# EAGLE board project_mount_board (EAGLE 9.1.3)

Size 100 x 80 mm. Coordinates in mm from the lower left corner, seen from the top.
Outline: 0,0 100,0 100,80 0,80 0,0
Copper layers (1*16): Top 0.035mm / dielectric 1.5mm / Bottom 0.035mm
Design rules "default": minimum track width 6mil, minimum drill 0.35mm, track to track 6mil, track to pad 6mil, pad to pad 6mil, via to via 6mil, smd to smd 6mil, copper to edge 40mil, drill to drill 6mil, minimum pad ring 10mil, minimum via ring 8mil, stop-mask expansion 4mil, vias tented up to drill 0mil, thermal gap 10mil

## Footprints (pad centres in the part's own frame; a part is rotated, then mirrored left to right if it is on the bottom)
ARDUINO_R3 = drill 1.016 pad 1.93: 3.3V 2.54,-24.13; 5V 5.08,-24.13; A0 17.78,-24.13; A1 20.32,-24.13; A2 22.86,-24.13; A3 25.4,-24.13; A4 27.94,-24.13; A5 30.48,-24.13; AREF -9.144,24.13; D0 30.48,24.13; D1 27.94,24.13; D2 25.4,24.13; D3 22.86,24.13; D4 20.32,24.13; D5 17.78,24.13; D6 15.24,24.13; D7 12.7,24.13; D8 8.636,24.13; D9 6.096,24.13; D10 3.556,24.13; D11 1.016,24.13; D12 -1.524,24.13; D13 -4.064,24.13; GND@1 7.62,-24.13; GND@2 10.16,-24.13; GND@3 -6.604,24.13; GND@4 33.16,-1.32; IOREF -2.54,-24.13; MISO 30.62,3.76; MOSI 33.16,1.22; NC -5.08,-24.13; RESET@1 0,-24.13; RESET@2 30.62,-1.32; SCK 30.62,1.22; SCL -14.224,24.13; SDA -11.684,24.13; VCC 33.16,3.76; VIN 12.7,-24.13 | hole 3.175: -17.78,24.13; 33.02,8.89; 33.02,-19.05; -19.05,-24.13
1X04 = drill 1.016 pad 1.88: 1 0,0; 2 2.54,0; 3 5.08,0; 4 7.62,0
2X5-SHROUDED-NO_SILK = drill 1.016 pad 1.88 square: 1 -1.27,5.08 | drill 1.016 pad 1.88: 2 1.27,5.08; 3 -1.27,2.54; 4 1.27,2.54; 5 -1.27,0; 6 1.27,0; 7 -1.27,-2.54; 8 1.27,-2.54; 9 -1.27,-5.08; 10 1.27,-5.08
1X11_NO_SILK = drill 1.016 pad 1.88: 1 0,0; 2 2.54,0; 3 5.08,0; 4 7.62,0; 5 10.16,0; 6 12.7,0; 7 15.24,0; 8 17.78,0; 9 20.32,0; 10 22.86,0; 11 25.4,0
1X07 = drill 1.016 pad 1.88: 1 0,0; 2 2.54,0; 3 5.08,0; 4 7.62,0; 5 10.16,0; 6 12.7,0; 7 15.24,0

## Placement (x,y rotation side)
B2  ARDUINO_UNO_R3  [ARDUINO_R3]  -177.8,-29.21 0 top  (outside the outline)
J10  [1X04]  -58.42,229.87 0 top  (outside the outline)
JP1  IDC-5X2  [2X5-SHROUDED-NO_SILK]  -212.09,-69.85 0 top  (outside the outline)
JP2  IDC-5x2  [2X5-SHROUDED-NO_SILK]  -201.93,-69.85 0 top  (outside the outline)
JP5  [1X11_NO_SILK]  -214.63,-90.17 0 top  (outside the outline)
JP6  [1X11_NO_SILK]  -214.63,-95.25 0 top  (outside the outline)
JP7  [1X07]  -214.63,-85.09 0 top  (outside the outline)

## Library data of the parts
B2 = SparkFun-Boards
J10 = SparkFun-Connectors; PROD_ID: CONN-09696
JP1 JP2 JP5-JP7 = SparkFun-Connectors

## Nets
3.3V: B2.3.3V
5V: B2.5V J10.4
!RESET!@2: B2.RESET@2
/RESET: B2.RESET@1
A0: B2.A0
A1: B2.A1
A2: B2.A2
A3: B2.A3
A4: B2.A4
AREF: B2.AREF
D0: B2.D0
D1: B2.D1
D2: B2.D2
D3: B2.D3
D4: B2.D4
D5: B2.D5
D6: B2.D6
D7: B2.D7
D8: B2.D8
D9: B2.D9
D13: B2.D13
GND: B2.GND@1 B2.GND@2 B2.GND@3 B2.GND@4 J10.1
IOREF: B2.IOREF
MISO: B2.MISO
MOSI: B2.MOSI
RXDATA: B2.D12 J10.2
SCK: B2.SCK
SCL: B2.SCL
VCC: B2.VCC
VIN: B2.VIN
WAKE_LED: B2.D10

## Tracks (layer width: path | path; a pad name or v marks a point on that pad's centre or on a via)
5V  (1 unrouted)
GND  (4 unrouted)
RXDATA  (1 unrouted)